# EAGLE board AMR3350 (EAGLE 9.2.0)
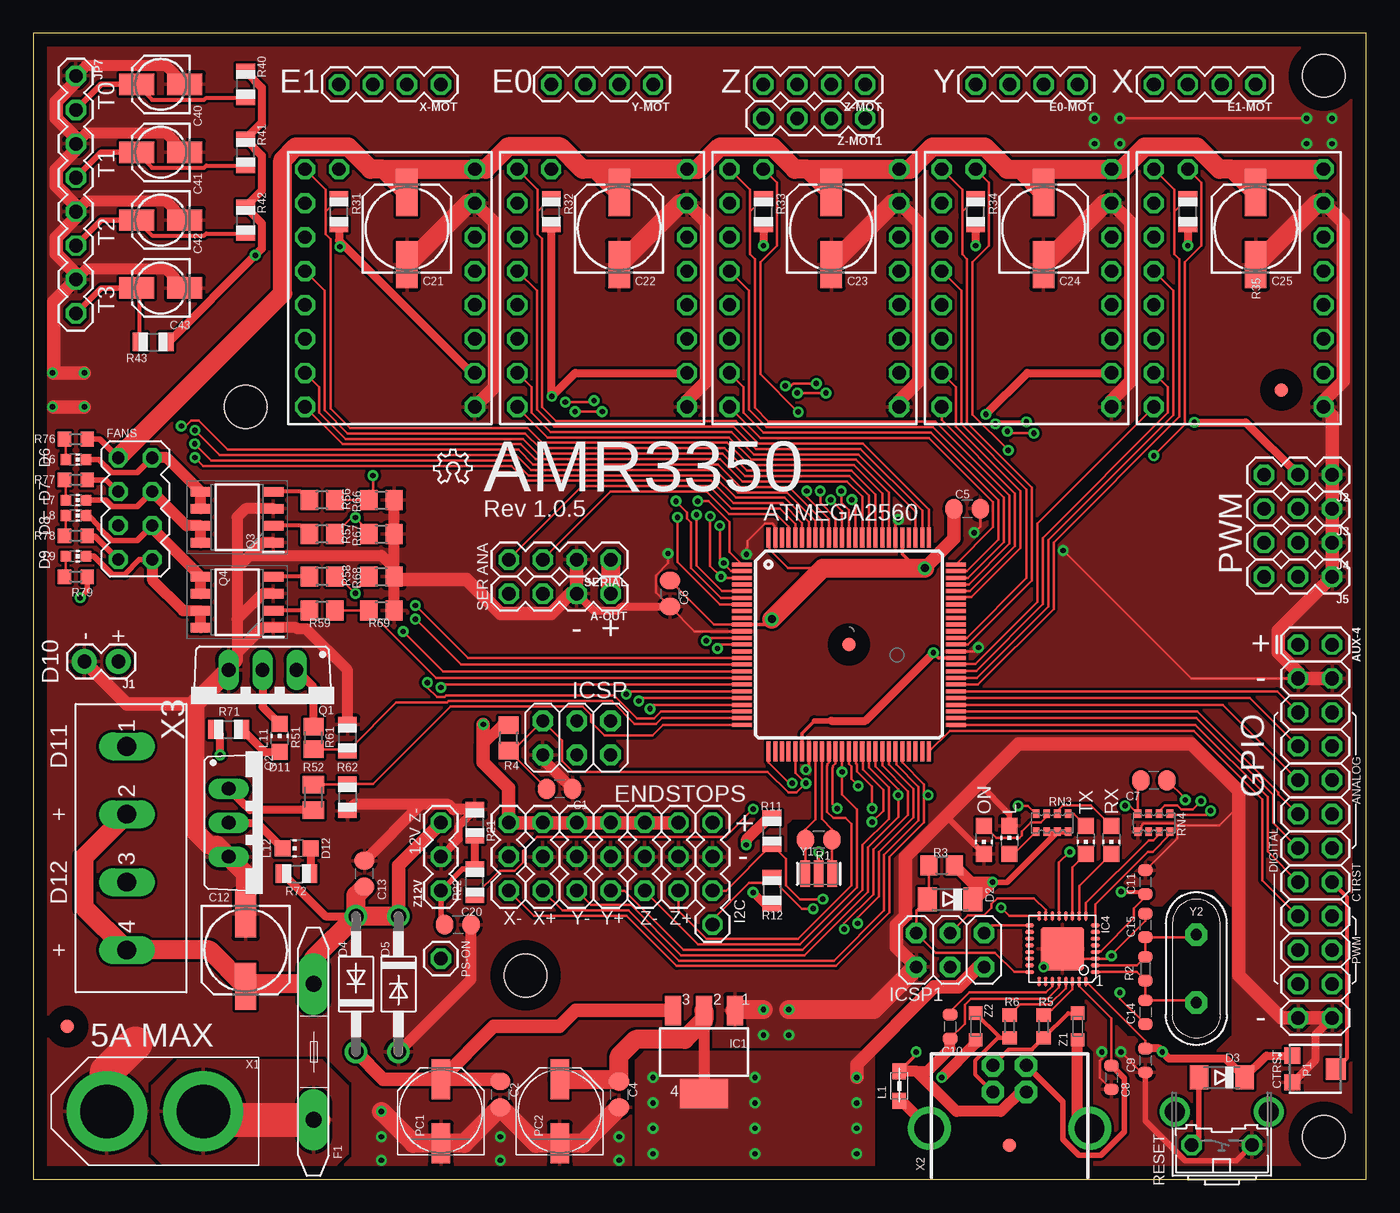
[diagram p0: board, top side]
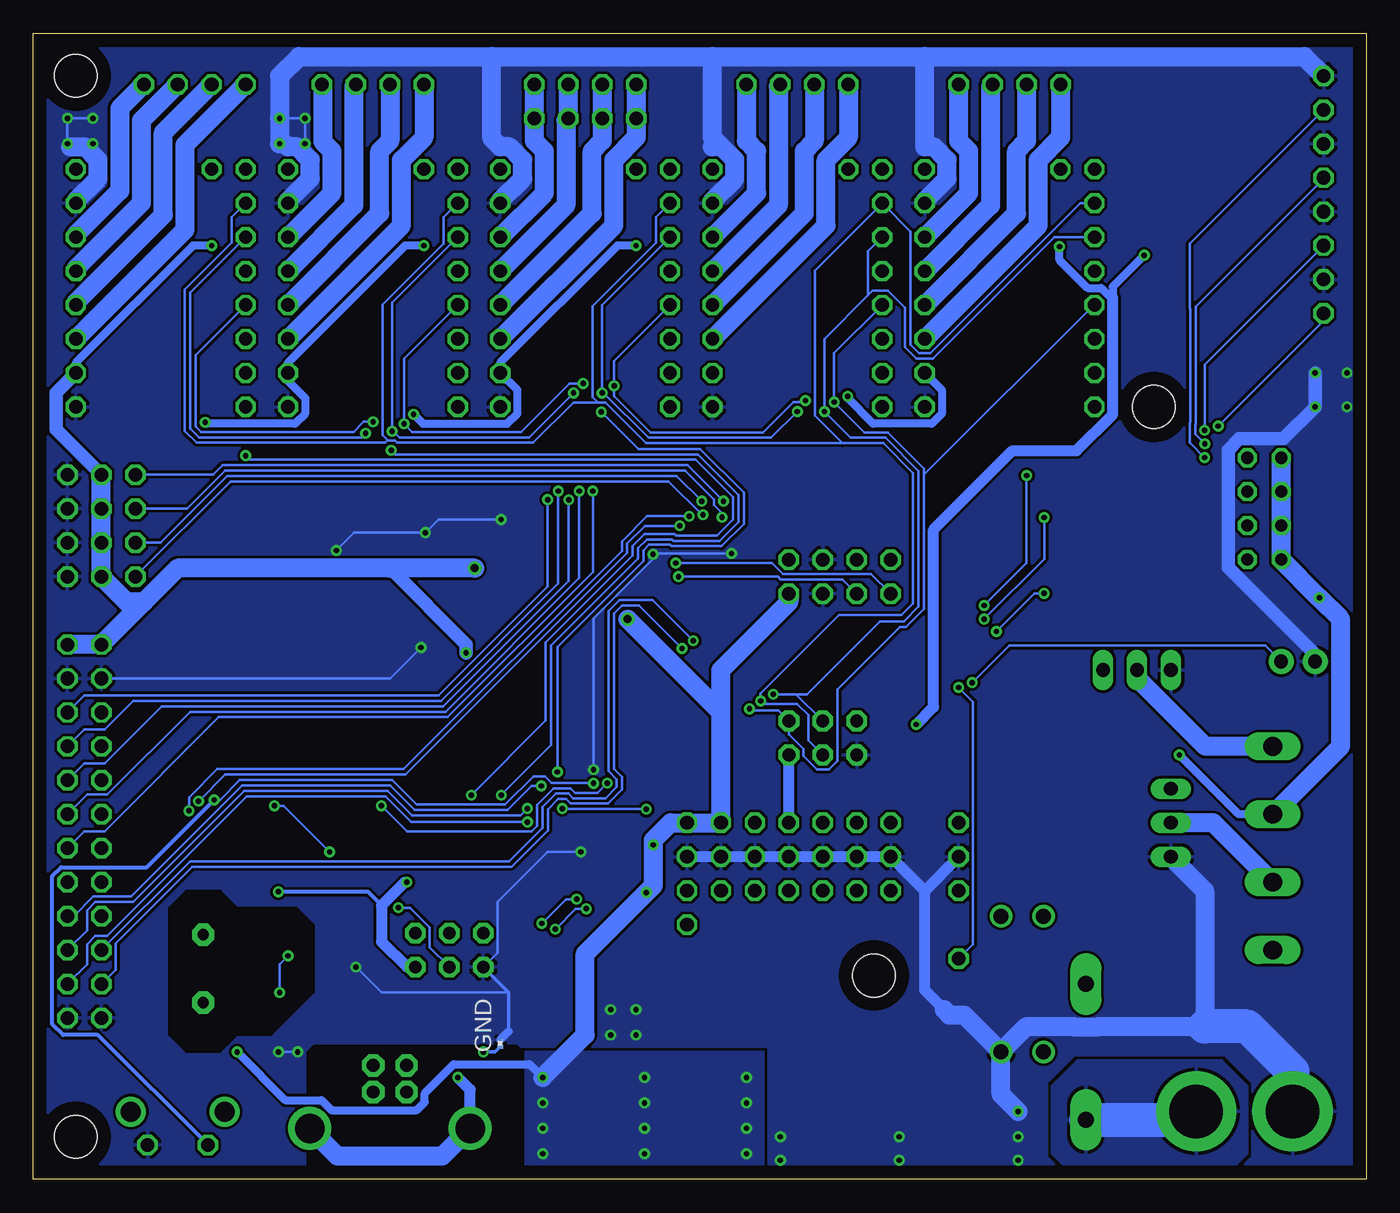
[diagram p1: board, bottom side, seen from below]

Size 99.69 x 85.72 mm. Coordinates in mm from the lower left corner, seen from the top.
Outline: 0,0 99.69,0 99.69,85.72 0,85.72 0,0
Copper layers (1*16): Top 0.035mm / dielectric 1.5mm / Bottom 0.035mm
Design rules "default *": minimum track width 6mil, minimum drill 0.4mm, track to track 8mil, track to pad 8mil, pad to pad 8mil, via to via 8mil, smd to smd 8mil, copper to edge 40mil, drill to drill 6mil, minimum pad ring 10mil, minimum via ring 8mil, stop-mask expansion 4mil, vias tented up to drill 0mil, thermal gap 10mil
Net classes: 1 power: width 0.203 mm, clearance 0.203 mm; 2 gnd: width 0.203 mm, clearance 0.203 mm; 3 power usb: width 0.203 mm, clearance 0.203 mm
Holes 3.2 mm at 96.52,3.17 96.52,82.55 36.83,15.24 15.88,57.78
tKeepout: area 93.5,79.6 to 99.5,85.5; area 93.5,0.2 to 99.5,6.2; area 33.8,12.2 to 39.8,18.2; area 12.9,54.8 to 18.9,60.8

## Footprints (pad centres in the part's own frame; a part is rotated, then mirrored left to right if it is on the bottom)
1X04_SMALL = drill 1.016 octagon: 1 0,0; 2 2.54,0; 3 5.08,0; 4 7.62,0
TQFP100 = smd 1.5 x 0.3: 1 -8,6; 2 -8,5.5; 3 -8,5; 4 -8,4.5; 5 -8,4; 6 -8,3.5; 7 -8,3; 8 -8,2.5; 9 -8,2; 10 -8,1.5; 11 -8,1; 12 -8,0.5; 13 -8,0; 14 -8,-0.5; 15 -8,-1; 16 -8,-1.5; 17 -8,-2; 18 -8,-2.5; 19 -8,-3; 20 -8,-3.5; 21 -8,-4; 22 -8,-4.5; 23 -8,-5; 24 -8,-5.5; 25 -8,-6; 51 8,-6; 52 8,-5.5; 53 8,-5; 54 8,-4.5; 55 8,-4; 56 8,-3.5; 57 8,-3; 58 8,-2.5; 59 8,-2; 60 8,-1.5; 61 8,-1; 62 8,-0.5; 63 8,0; 64 8,0.5; 65 8,1; 66 8,1.5; 67 8,2; 68 8,2.5; 69 8,3; 70 8,3.5; 71 8,4; 72 8,4.5; 73 8,5; 74 8,5.5; 75 8,6 | smd 0.3 x 1.5: 26 -6,-8; 27 -5.5,-8; 28 -5,-8; 29 -4.5,-8; 30 -4,-8; 31 -3.5,-8; 32 -3,-8; 33 -2.5,-8; 34 -2,-8; 35 -1.5,-8; 36 -1,-8; 37 -0.5,-8; 38 0,-8; 39 0.5,-8; 40 1,-8; 41 1.5,-8; 42 2,-8; 43 2.5,-8; 44 3,-8; 45 3.5,-8; 46 4,-8; 47 4.5,-8; 48 5,-8; 49 5.5,-8; 50 6,-8; 76 6,8; 77 5.5,8; 78 5,8; 79 4.5,8; 80 4,8; 81 3.5,8; 82 3,8; 83 2.5,8; 84 2,8; 85 1.5,8; 86 1,8; 87 0.5,8; 88 0,8; 89 -0.5,8; 90 -1,8; 91 -1.5,8; 92 -2,8; 93 -2.5,8; 94 -3,8; 95 -3.5,8; 96 -4,8; 97 -4.5,8; 98 -5,8; 99 -5.5,8; 100 -6,8
2X12_SMALL = drill 1.016 octagon: 1 0,0; 2 0,2.54; 3 2.54,0; 4 2.54,2.54; 5 5.08,0; 6 5.08,2.54; 7 7.62,0; 8 7.62,2.54; 9 10.16,0; 10 10.16,2.54; 11 12.7,0; 12 12.7,2.54; 13 15.24,0; 14 15.24,2.54; 15 17.78,0; 16 17.78,2.54; 17 20.32,0; 18 20.32,2.54; 19 22.86,0; 20 22.86,2.54; 21 25.4,0; 22 25.4,2.54; 23 27.94,0; 24 27.94,2.54
C0805RND = smd 1.3 x 1.5: 1 -0.977,0; 2 0.977,0
C0603-ROUND = smd 0.898 x 1.1: 1 -0.889,0; 2 0.889,0
153CLV-0605 = smd 3.5 x 1.6: + 2.7,0; - -2.7,0
153CLV-0405 = smd 2.6 x 1.6: + 1.8,0; - -1.8,0
MINIMELF = smd 1.4 x 1.8: A 1.7,0; C -1.7,0
DO41-10 = drill 1.118: A 5.08,0; C -5.08,0
MFR500 = drill 1.2 pad 2.3 long: 1 -5.08,0; 2 5.08,0
2X4 = drill 0.9 pad 1.422 octagon: 1 -3.81,-1.27; 2 -3.81,1.27; 3 -1.27,-1.27; 4 -1.27,1.27; 5 1.27,-1.27; 6 1.27,1.27; 7 3.81,-1.27; 8 3.81,1.27
FIDUCIA-MOUNT = smd 1.016 x 1.016: P$1 0,0
R0201 = smd 0.28 x 0.43: 1 -0.255,0; 2 0.255,0
SOT223 = smd 1.219 x 2.235: 1 -2.311,-3.099; 2 0,-3.099; 3 2.311,-3.099 | smd 3.6 x 2.2: 4 0,3.099
MLF32 = smd 0.7 x 0.28: 1 -2.45,1.75; 2 -2.45,1.25; 3 -2.45,0.75; 4 -2.45,0.25; 5 -2.45,-0.25; 6 -2.45,-0.75; 7 -2.45,-1.25; 8 -2.45,-1.75; 17 2.45,-1.75; 18 2.45,-1.25; 19 2.45,-0.75; 20 2.45,-0.25; 21 2.45,0.25; 22 2.45,0.75; 23 2.45,1.25; 24 2.45,1.75 | smd 0.28 x 0.7: 9 -1.75,-2.45; 10 -1.25,-2.45; 11 -0.75,-2.45; 12 -0.25,-2.45; 13 0.25,-2.45; 14 0.75,-2.45; 15 1.25,-2.45; 16 1.75,-2.45; 25 1.75,2.45; 26 1.25,2.45; 27 0.75,2.45; 28 0.25,2.45; 29 -0.25,2.45; 30 -0.75,2.45; 31 -1.25,2.45; 32 -1.75,2.45 | smd 3.254 x 3.254: 33 0,0
2X03 = drill 0.95 pad 1.55 octagon: 1 -2.54,-1.27; 2 -2.54,1.27; 3 0,-1.27; 4 0,1.27; 5 2.54,-1.27; 6 2.54,1.27
1X02 = drill 1.016 pad 1.88: 1 0,0; 2 2.54,0
1X03_SMALL = drill 1.016 octagon: 1 0,0; 2 2.54,0; 3 5.08,0
1X08_SMALL = drill 1.016 octagon: 1 0,0; 2 2.54,0; 3 5.08,0; 4 7.62,0; 5 10.16,0; 6 12.7,0; 7 15.24,0; 8 17.78,0
CHIP-LED0805 = smd 1.2 x 1.2: A 0,-1.05; C 0,1.05
0805 = smd 1.2 x 1: 1 -1.1,0; 2 1.1,0
CHIP-LED0603 = smd 0.8 x 0.8: A 0,-0.75; C 0,0.75
TC33X-2_1 = smd 1.2 x 1.2: 1 -1,-1.7; 3 1,-1.7 | smd 1.6 x 1.5: 2 0,1.55
PANASONIC_D = smd 3 x 1.4: + 2.4,0; - -2.4,0
1X01_SMALL = drill 1.016 octagon: 1 0,0
TO220BV = drill 1.016 long: D 0,-2.54; G -2.54,-2.54; S 2.54,-2.54
SOIC127P600X175-8N = smd 1.525 x 0.7: 1 -2.712,1.905; 2 -2.712,0.635; 3 -2.712,-0.635; 4 -2.712,-1.905; 5 2.712,-1.905; 6 2.712,-0.635; 7 2.712,0.635; 8 2.712,1.905
R0805RND = smd 1.3 x 1.5: 1 -0.977,0; 2 0.977,0
R0603-ROUND = smd 0.898 x 1.1: 1 -0.889,0; 2 0.889,0
R0805 = smd 1.3 x 1.5: 1 -0.95,0; 2 0.95,0
R0603 = smd 1 x 1.1: 1 -0.85,0; 2 0.85,0
R0805' = smd 1.1 x 1.4: 1 -1,0; 2 1,0
R0805'' = smd 1.3 x 1.5: 1 -0.85,0; 2 0.85,0
M0805 = smd 1.3 x 1.6: 1 -0.95,0; 2 0.95,0
B3F-31XX = drill 1.016 octagon: 1 -2.261,-1.245; 2 2.261,-1.245 | drill 1.499 pad 2.159: 3 -3.505,1.245; 4 3.505,1.245
CAY16 = smd 0.5 x 0.65: 1 -1.2,-0.675; 2 -0.4,-0.675; 3 0.4,-0.675; 4 1.2,-0.675; 5 1.2,0.675; 6 0.4,0.675; 7 -0.4,0.675; 8 -1.2,0.675
TMC2130BREAKOUT = drill 1 octagon: 3 13.97,13.97; CFG-0 13.97,11.43; CFG-1 13.97,3.81; CFG-2 13.97,6.35; CFG-3 13.97,8.89; CFG-6 13.97,1.27; DIR 13.97,19.05; GND 1.27,3.81; GND@0 1.27,19.05; IREF 11.43,1.27; OA1 1.27,11.43; OA2 1.27,13.97; OB1 1.27,8.89; OB2 1.27,6.35; STEP 13.97,16.51; VIO 1.27,16.51; VM 1.27,1.27
XT60 = drill 4 pad 6: P$1 0,0; P$2 7.2,0
PN61729-NOSILK = drill 0.95 pad 1.676 octagon: 1 1.25,4.71; 2 -1.25,4.71; 3 -1.25,2.71; 4 1.25,2.71 | drill 2.2: P$1 -6,0; P$2 6,0
4-PIN = drill 1.397 long: 1 -7.62,5.08; 2 -2.54,5.08; 3 2.54,5.08; 4 7.62,5.08
RESONATOR = smd 0.7 x 2: 1 -1,0; 2 0,0; 3 1,0
QS = drill 0.85 pad 1.676 octagon: 1 -2.54,0; 2 2.54,0
CT/CN0603 = smd 1 x 1: 1 -1,0; 2 1,0

## Placement (x,y rotation side)
A-OUT  [1X04_SMALL]  43.18,43.81 180 top
ATMEGA2560  ATMEGA2560-16AU  [TQFP100]  61,40 0 top
AUX-4  CONN_12X2SMALL  [2X12_SMALL]  94.61,40.01 270 top
C1  22p  [C0805RND]  39.37,29.21 0 top
C2  100n  [C0805RND]  34.92,6.35 270 top
C4  100n  [C0805RND]  43.81,6.35 270 top
C5  100n  [C0805RND]  69.85,50.16 0 top
C6  100n  [C0805RND]  47.62,43.81 270 top
C7  100n  [C0805RND]  83.82,29.84 0 top
C8  100n  [C0603-ROUND]  80.64,7.62 270 top
C9  100n  [C0603-ROUND]  83.19,8.89 270 top
C10  1u  [C0603-ROUND]  68.58,11.43 270 top
C11  100n  [C0603-ROUND]  83.19,22.23 90 top
C12  100uF  [153CLV-0605]  15.88,17.14 270 top
C13  100n  [C0805RND]  24.77,22.86 90 top
C14  22p  [C0603-ROUND]  83.19,12.5 270 top
C15  22p  [C0603-ROUND]  83.19,19 90 top
C20  100n  [C0805RND]  31.75,19.05 0 top
C21  100uF  [153CLV-0605]  27.94,71.12 90 top
C22  100uF  [153CLV-0605]  43.81,71.12 90 top
C23  100uF  [153CLV-0605]  59.69,71.12 90 top
C24  100uF  [153CLV-0605]  75.56,71.12 90 top
C25  100uF  [153CLV-0605]  91.44,71.12 90 top
C40  10uF  [153CLV-0405]  9.53,81.92 180 top
C41  10uF  [153CLV-0405]  9.53,76.83 180 top
C42  10uF  [153CLV-0405]  9.53,71.75 180 top
C43  10uF  [153CLV-0405]  9.53,66.67 180 top
D2  CD1206-S01575  [MINIMELF]  68.58,20.95 180 top
D3  CD1206-S01575  [MINIMELF]  88.9,7.62 180 top
D4  1N4004  [DO41-10]  24.13,14.61 90 top
D5  1N4004  [DO41-10]  27.3,14.61 270 top
E0-MOT  [1X04_SMALL]  78.11,81.92 180 top
E1-MOT  [1X04_SMALL]  91.44,81.92 180 top
F1  MFR500  [MFR500]  20.95,9.53 270 top
FANS  M04X2  [2X4]  7.62,50.16 270 top
FD1  FIDUCIALMOUNT  [FIDUCIA-MOUNT]  61,40 0 top
FD2  FIDUCIALMOUNT  [FIDUCIA-MOUNT]  2.54,11.43 0 top
FD3  FIDUCIALMOUNT  [FIDUCIA-MOUNT]  93.34,59.05 0 top
FD4  FIDUCIALMOUNT  [FIDUCIA-MOUNT]  73.03,2.54 0 top
GND  0  [R0201]  64.77,10.16 90 bottom
I2C  [1X04_SMALL]  50.8,26.67 270 top
IC1  NCP1117ST50T3G  [SOT223]  50.16,9.53 180 top
IC4  ATMEGA16U2-MU  [MLF32]  76.98,17.25 180 top
ICSP  3x2M  [2X03]  40.64,33.02 180 top
ICSP1  3x2M  [2X03]  68.58,17.14 180 top
J1  [1X02]  6.35,38.73 180 top
J2  455-1750-1-ND  [1X03_SMALL]  97.16,52.7 180 top
J3  455-1750-1-ND  [1X03_SMALL]  97.16,50.16 180 top
J4  455-1750-1-ND  [1X03_SMALL]  97.16,47.62 180 top
J5  455-1750-1-ND  [1X03_SMALL]  97.16,45.09 180 top
JP7  [1X08_SMALL]  3.17,82.55 270 top
L  RED  [CHIP-LED0805]  73.03,25.4 0 top
L1  BLM21  [0805]  64.77,6.99 270 top
L6  [CHIP-LED0603]  3.17,53.85 270 top
L7  [CHIP-LED0603]  3.17,50.8 270 top
L8  [CHIP-LED0603]  3.17,49.66 270 top
L9  [CHIP-LED0603]  3.17,46.61 270 top
L11  [CHIP-LED0805]  18.41,33.02 0 top
L12  [CHIP-LED0805]  19.68,24.77 90 top
LOGO2  OSHW_LOGO_6MILX0100-NT  [OSHW_6X100_NOTEXT]  29.97,52.07 0 top
ON  GREEN  [CHIP-LED0805]  71.12,25.4 180 top
P1  TC33X-2-103E  [TC33X-2_1]  95.89,8.26 270 top
PC1  47u  [PANASONIC_D]  30.48,5.08 90 top
PC2  47u  [PANASONIC_D]  39.37,5.08 90 top
PS-ON  [1X01_SMALL]  30.48,16.51 270 top
Q1  STP55NF06L  [TO220BV]  17.14,35.56 180 top
Q2  STP55NF06L  [TO220BV]  17.14,26.67 270 top
Q3  SI4946CDY-T1-GE3  [SOIC127P600X175-8N]  15.24,49.53 180 top
Q4  SI4946CDY-T1-GE3  [SOIC127P600X175-8N]  15.24,43.18 180 top
R1  1M  [R0805RND]  58.75,25.4 180 top
R2  1M  [R0603-ROUND]  83.19,15.75 90 top
R3  10k  [R0805]  67.94,23.5 0 top
R4  10k  [R0805]  35.56,33.02 90 top
R5  22R  [R0603]  75.56,11.43 270 top
R6  22R  [R0603]  73.03,11.43 270 top
R11  3.3K  [R0805']  55.24,26.04 90 top
R12  3.3K  [R0805']  55.24,21.59 270 top
R21  10k  [R0805']  33.02,26.67 270 top
R22  15k  [R0805']  33.02,22.23 90 top
R31  10k  [R0805']  22.86,72.39 90 top
R32  10k  [R0805']  38.73,72.39 90 top
R33  10k  [R0805']  54.61,72.39 90 top
R34  10k  [R0805']  70.48,72.39 90 top
R35  10k  [R0805']  86.36,72.39 90 top
R40  4.7K  [R0805']  15.88,81.92 90 top
R41  4.7K  [R0805']  15.88,76.83 90 top
R42  4.7K  [R0805']  15.88,71.75 90 top
R43  4.7K  [R0805']  8.96,62.64 0 top
R51  10r  [R0805'']  20.95,33.02 90 top
R52  10r  [M0805]  20.95,28.57 270 top
R56  10R  [R0805]  21.59,50.8 180 top
R57  10R  [R0805]  21.59,48.26 180 top
R58  10R  [R0805]  21.59,45.09 180 top
R59  10R  [R0805]  21.59,42.55 180 top
R61  100k  [R0805']  23.5,33.02 90 top
R62  100k  [R0805']  23.5,28.57 270 top
R66  100k  [R0805]  26.04,50.8 0 top
R67  100k  [R0805]  26.04,48.26 0 top
R68  100k  [R0805]  26.04,45.09 0 top
R69  100k  [R0805]  26.04,42.55 0 top
R71  1.8K  [R0805']  14.61,33.66 0 top
R72  1.8K  [R0805']  19.68,22.86 0 top
R76  [R0603]  3.17,55.37 0 top
R77  [R0603]  3.17,52.32 0 top
R78  [R0603]  3.17,48.13 0 top
R79  [R0603]  3.17,45.09 0 top
RESET  [B3F-31XX]  88.9,3.81 0 top
RN3  1k  [CAY16]  76.2,26.67 0 top
RN4  1k  [CAY16]  83.82,26.67 180 top
RX  YELLOW  [CHIP-LED0805]  80.64,25.4 180 top
SERIAL  [1X04_SMALL]  43.18,46.35 180 top
TX  YELLOW  [CHIP-LED0805]  78.74,25.4 180 top
U$1  TMC2130BREAKOUT  [TMC2130BREAKOUT]  34.29,76.83 180 top
U$2  TMC2130BREAKOUT  [TMC2130BREAKOUT]  50.16,76.83 180 top
U$3  TMC2130BREAKOUT  [TMC2130BREAKOUT]  66.04,76.83 180 top
U$4  TMC2130BREAKOUT  [TMC2130BREAKOUT]  97.79,76.83 180 top
U$5  TMC2130BREAKOUT  [TMC2130BREAKOUT]  81.92,76.83 180 top
X1  XT60  [XT60]  12.7,5.08 180 top
X2  USB-B_TH  [PN61729-NOSILK]  73.03,3.81 0 top
X3  4-PIN  [4-PIN]  1.91,24.77 270 top
X+  455-1750-1-ND  [1X03_SMALL]  38.1,21.59 90 top
X-  455-1750-1-ND  [1X03_SMALL]  35.56,21.59 90 top
X-MOT  [1X04_SMALL]  30.48,81.92 180 top
Y1  CSTCE16M0V53-R0 16MHZ  [RESONATOR]  58.75,22.86 0 top
Y2  16MHz  [QS]  87,15.75 270 top
Y+  455-1750-1-ND  [1X03_SMALL]  43.18,21.59 90 top
Y-  455-1750-1-ND  [1X03_SMALL]  40.64,21.59 90 top
Y-MOT  [1X04_SMALL]  46.35,81.92 180 top
Z1  CG0603MLC-05E  [CT/CN0603]  78.11,11.43 90 top
Z2  CG0603MLC-05E  [CT/CN0603]  70.48,11.43 90 top
Z12V  455-1750-1-ND  [1X03_SMALL]  30.48,21.59 90 top
Z+  455-1750-1-ND  [1X03_SMALL]  48.26,21.59 90 top
Z-  455-1750-1-ND  [1X03_SMALL]  45.72,21.59 90 top
Z-MOT  [1X04_SMALL]  62.23,81.92 180 top
Z-MOT1  [1X04_SMALL]  62.23,79.38 180 top

## Library data of the parts
A-OUT AUX-4 E0-MOT E1-MOT I2C J1-J5 JP7 PS-ON SERIAL X+ X- X-MOT Y+ Y- Y-MOT Z12V Z+ Z- Z-MOT Z-MOT1 = SparkFun-Connectors
ATMEGA2560 C1 C2 C4-C11 C13-C15 C20 FD1-FD4 IC4 ICSP ICSP1 R1 R2 X2 Y1 Y2 = SmartPrj
C12 C21-C25 C40-C43 R11 R12 R21 R22 R31-R35 R40-R43 R61 R62 R71 R72 = adafruit
D2-D5 = diode
F1 = RepRapjr
FANS = SparkFun
GND R3-R6 R51 R52 R56-R59 R66-R69 R76-R79 = resistor
IC1 = linear
L L6-L9 L11 L12 ON RX TX = led
L1 = wuerth-elektronik
LOGO2 = OSHW
P1 = TC33X-2-103E; ALLIED_NUMBER: 70153492; ALLIED_PRICE-STOCK: http://www.alliedelec.com/bourns-tc33x-2-103e/70153492/; ARROW_PART_NUMBER: TC33X-2-103E; ARROW_PRICE-STOCK: https://www.arrow.com/en/products/tc33x-2-103e/bourns; DESCRIPTION: Cermet 3mm SMT trimmer,0.1W 10k Bourns TC33 Series SMD Cermet Trimmer Resistor with Solder Pad Terminations, 10k?? ??25% 1/10W ??250ppm/??C Top Adjust; HEIGHT: mm; MANUFACTURER_NAME: Bourns; MANUFACTURER_PART_NUMBER: TC33X-2-103E; RS_PART_NUMBER: 1673549; RS_PRICE-STOCK: http://uk.rs-online.com/web/p/products/1673549
PC1 PC2 = rcl; SPICEPREFIX: C
Q1 Q2 = transistor-power
Q3 Q4 = SI4946CDY-T1-GE3
RESET = switch-omron; MPN: B3F-3100; OC_FARNELL: 959704; OC_NEWARK: 36M3582
RN3 RN4 = resistor-dil; OC_FARNELL: unknown; OC_NEWARK: unknown
U$1-U$5 = TMC2130
X1 = con-other
X3 = con-508-gen
Z1 Z2 = varistor

## Nets
12V-IN [power]: F1.2 X1.P$1
+5V [power usb]: A-OUT.1 ATMEGA2560.10 ATMEGA2560.31 ATMEGA2560.61 ATMEGA2560.80 ATMEGA2560.100 AUX-4.1 AUX-4.2 C4.1 C5.1 C6.1 C9.1 C11.1 D2.C D3.C I2C.1 IC1.2 IC1.4 IC4.4 IC4.32 ICSP1.2 ICSP.2 J2.2 J3.2 J4.2 J5.2 P1.1 PC2.+ R3.2 R4.2 R11.2 R12.2 R31.1 R32.1 R33.1 R34.1 R35.1 R40.2 R41.2 R42.2 R43.2 RN3.2 RN3.3 RN3.4 SERIAL.1 U$1.VIO U$2.VIO U$3.VIO U$4.VIO U$5.VIO X+.3 X-.3 Y+.3 Y-.3 Z+.3 Z-.3
+12V: C12.+ C13.1 C21.+ C22.+ C23.+ C24.+ C25.+ D4.A D5.C F1.1 FANS.1 FANS.3 FANS.5 FANS.7 R71.1 R72.1 R76.2 R77.2 R78.2 R79.2 U$1.VM U$2.VM U$3.VM U$4.VM U$5.VM X3.2 X3.4 Z12V.3
A0: ATMEGA2560.97 SERIAL.3
A1: ATMEGA2560.96 SERIAL.4
A2: ATMEGA2560.95 C40.+ JP7.2 R40.1
A3: ATMEGA2560.94 C41.+ JP7.4 R41.1
A4: ATMEGA2560.93 C42.+ JP7.6 R42.1
A5: ATMEGA2560.92 C43.+ JP7.8 R43.1
A6: ATMEGA2560.91 AUX-4.14
A7: ATMEGA2560.90 AUX-4.12
A8: ATMEGA2560.89 AUX-4.10
A9: ATMEGA2560.88 AUX-4.8
A10: ATMEGA2560.87 AUX-4.6
A11: ATMEGA2560.86 U$1.DIR
A12: ATMEGA2560.85 U$1.STEP
A13: ATMEGA2560.84 U$1.CFG-3
A14: ATMEGA2560.83 R31.2 U$1.CFG-6
A15: ATMEGA2560.82 U$2.DIR
CTRST: AUX-4.16 P1.2
D0: A-OUT.4 ATMEGA2560.2 RN4.2
D1: A-OUT.3 ATMEGA2560.3 RN4.1
D2: ATMEGA2560.6 J2.3
D3: ATMEGA2560.7 J3.3
D4: ATMEGA2560.1 J4.3
D5: ATMEGA2560.5 J5.3
D6: ATMEGA2560.15 R56.1 R66.1
D7: ATMEGA2560.16 R57.1 R67.1
D8: ATMEGA2560.17 R58.1 R68.1
D9: ATMEGA2560.18 R59.1 R69.1
D10: ATMEGA2560.23 J1.1
D11: ATMEGA2560.24 R51.1 R61.1
D12: ATMEGA2560.25 R52.1 R62.1
D13(LED): ATMEGA2560.26 RN3.8
D14: ATMEGA2560.64 U$5.CFG-3
D15: ATMEGA2560.63 R34.2 U$5.CFG-6
D16: ATMEGA2560.13 AUX-4.21
D17: ATMEGA2560.12 AUX-4.19
D18: ATMEGA2560.46 U$4.IREF X-.1
D19: ATMEGA2560.45 X+.1
D22: ATMEGA2560.78 U$2.STEP
D23: ATMEGA2560.77 U$2.CFG-3
D24: ATMEGA2560.76 R32.2 U$2.CFG-6
D25: ATMEGA2560.75 U$3.DIR
D26: ATMEGA2560.74 U$3.STEP
D27: ATMEGA2560.73 U$3.CFG-3
D28: ATMEGA2560.72 R33.2 U$3.CFG-6
D29: ATMEGA2560.71 U$5.DIR
D30: ATMEGA2560.60 U$4.DIR
D31: ATMEGA2560.59 U$4.STEP
D32: ATMEGA2560.58 U$4.CFG-3
D33: ATMEGA2560.57 R35.2 U$4.CFG-6
D34: ATMEGA2560.56 AUX-4.5
D35: ATMEGA2560.55 AUX-4.7
D36: ATMEGA2560.54 AUX-4.9
D37: ATMEGA2560.53 AUX-4.11
D38: ATMEGA2560.50 AUX-4.17
D39: ATMEGA2560.70 U$5.STEP
D40: ATMEGA2560.52 AUX-4.13
D41: ATMEGA2560.51 AUX-4.15
D42: ATMEGA2560.42 U$5.IREF Y-.1
D43: ATMEGA2560.41 Y+.1
D44: ATMEGA2560.40 AUX-4.22
D45: ATMEGA2560.39 AUX-4.20
D46: ATMEGA2560.38 AUX-4.18
D47: ATMEGA2560.37 U$3.IREF Z-.1
D48: ATMEGA2560.36 R22.1
D49: ATMEGA2560.35 Z+.1
D53: ATMEGA2560.19 PS-ON.1
D+: R6.2 X2.3 Z2.2
D-: R5.2 X2.2 Z1.2
DTR: C7.1 IC4.13 RN4.4
E0-1: E0-MOT.1 U$5.OB2
E0-2: E0-MOT.2 U$5.OB1
E0-3: E0-MOT.3 U$5.OA1
E0-4: E0-MOT.4 U$5.OA2
E1-1: E1-MOT.1 U$4.OB2
E1-2: E1-MOT.2 U$4.OB1
E1-3: E1-MOT.3 U$4.OA1
E1-4: E1-MOT.4 U$4.OA2
GND [gnd]: A-OUT.2 ATMEGA2560.11 ATMEGA2560.32 ATMEGA2560.62 ATMEGA2560.81 ATMEGA2560.99 AUX-4.3 AUX-4.4 AUX-4.23 AUX-4.24 C1.2 C2.2 C4.2 C5.2 C6.2 C8.2 C9.2 C11.2 C12.- C13.2 C14.2 C15.2 C20.2 C21.- C22.- C23.- C24.- C25.- C40.- C41.- C42.- C43.- D5.A GND.2 I2C.2 IC1.1 IC4.3 IC4.33 ICSP1.6 ICSP.6 J1.2 J2.1 J3.1 J4.1 J5.1 JP7.1 JP7.3 JP7.5 JP7.7 L.C ON.C P1.3 PC1.- PC2.- Q1.S Q2.S Q3.1 Q3.3 Q4.1 Q4.3 R21.1 R61.2 R62.2 R66.2 R67.2 R68.2 R69.2 RESET.2 RN4.5 SERIAL.2 U$1.GND U$1.GND@0 U$2.GND U$2.GND@0 U$3.GND U$3.GND@0 U$4.GND U$4.GND@0 U$5.GND U$5.GND@0 X1.P$2 X+.2 X-.2 Y1.2 Y+.2 Y-.2 Z12V.2 Z+.2 Z-.2
L: L.A RN3.1
M8RXD: IC4.9 RN4.7
M8TXD: IC4.8 RN4.8
MISO: ATMEGA2560.22 ICSP.1 U$1.CFG-0 U$2.CFG-0 U$3.CFG-0 U$4.CFG-0 U$5.CFG-0
MISO2: IC4.17 ICSP1.1
MOSI: ATMEGA2560.21 ICSP.4 U$1.CFG-1 U$2.CFG-1 U$3.CFG-1 U$4.CFG-1 U$5.CFG-1
MOSI2: IC4.16 ICSP1.4
N$1: L9.A R79.1
N$2: L8.A R78.1
N$3: C20.1 R21.2 R22.2 Z12V.1
N$4: L6.A R76.1
N$5: L7.A R77.1
N$107: L12.A R72.2
N$108: L11.A R71.2
ON: ON.A RN3.7
Q1-D: L11.C Q1.D X3.1
Q1-G: Q1.G R51.2
Q2-D: L12.C Q2.D X3.3
Q2-G: Q2.G R52.2
Q6-D: FANS.2 L6.C Q3.5 Q3.6
Q6-G: Q3.4 R56.2
Q7-D: FANS.4 L7.C Q3.7 Q3.8
Q7-G: Q3.2 R57.2
Q8-D: FANS.6 L8.C Q4.5 Q4.6
Q8-G: Q4.4 R58.2
Q9-D: FANS.8 L9.C Q4.7 Q4.8
Q9-G: Q4.2 R59.2
RD+: IC4.29 R6.1
RD-: IC4.30 R5.1
RESET: ATMEGA2560.30 C1.1 C7.2 D3.A ICSP.5 R4.1 RESET.1
RESET2: D2.A IC4.24 ICSP1.5 R3.1
RX: RN3.6 RX.A
RXL: IC4.10 RX.C
SCK: ATMEGA2560.20 ICSP.3 U$1.CFG-2 U$2.CFG-2 U$3.CFG-2 U$4.CFG-2 U$5.CFG-2
SCK2: IC4.15 ICSP1.3
SCL: ATMEGA2560.43 I2C.4 R12.1
SDA: ATMEGA2560.44 I2C.3 R11.1
TX: RN3.5 TX.A
TXL: IC4.11 TX.C
UGND [gnd]: C10.2 GND.1 IC4.28 L1.1 X2.4
USBVCC [power usb]: C8.1 IC4.31 X2.1
USHIELD [gnd]: L1.2 X2.P$1 X2.P$2 Z1.1 Z2.1
VIN [power]: C2.1 D4.C IC1.3 PC1.+
VUCAP: C10.1 IC4.27
X-1: U$1.OB2 X-MOT.1
X-2: U$1.OB1 X-MOT.2
X-3: U$1.OA1 X-MOT.3
X-4: U$1.OA2 X-MOT.4
XT1: C14.1 IC4.1 R2.1 Y2.2
XT2: C15.1 IC4.2 R2.2 Y2.1
XTAL1: ATMEGA2560.34 R1.1 Y1.3
XTAL2: ATMEGA2560.33 R1.2 Y1.1
Y-1: U$2.OB2 Y-MOT.1
Y-2: U$2.OB1 Y-MOT.2
Y-3: U$2.OA1 Y-MOT.3
Y-4: U$2.OA2 Y-MOT.4
Z-1: U$3.OB2 Z-MOT1.1 Z-MOT.1
Z-2: U$3.OB1 Z-MOT1.2 Z-MOT.2
Z-3: U$3.OA1 Z-MOT1.3 Z-MOT.3
Z-4: U$3.OA2 Z-MOT1.4 Z-MOT.4

## Tracks (layer width: path | path; a pad name or v marks a point on that pad's centre or on a via)
12V-IN
  Top 2.54: X1.P$1 13.34,4.45 F1.2
  Bottom 2.54: X1.P$1 13.34,4.45 F1.2
  pour Top: 8.89,5.08 8.89,6.99 10.79,8.89 21.59,8.89 23.5,6.99 23.5,1.91 21.59,0 10.79,0 8.89,1.91
  pour Bottom: 8.89,5.08 8.89,6.99 10.79,8.89 21.59,8.89 23.5,6.99 23.5,1.91 21.59,0 10.79,0 8.89,1.91
+5V  (via drill 0.4, 0.6)
  Top 0.203: C11.1 83.19,21.11 82.33,20.25 82.33,19.55 79.84,17.05 79.48,17.05 IC4.4 | IC4.32 83.19,10.35 C9.1 | ATMEGA2560.100 55.05,47.95 55.05,47.12 56.45,45.72 59.05,45.72 | ATMEGA2560.10 50.92,41.5 C6.1
  Top 0.254: ATMEGA2560.31 57.5,33.37 58.42,34.29 | ATMEGA2560.10 54.84,41.5 v55.24,41.91 | ATMEGA2560.80 65,46.76 66.04,45.72 | ATMEGA2560.61 67.71,39 v67.33,39.39
  Top 0.305: v81.36,21.51 83.02,21.51 C11.1
  Top 0.406: 58.42,34.29 59.69,34.29 | v71.75,22.23 72.83,22.23 RN3.3 | RN3.2 RN3.3 | RN3.3 RN3.4
  Top 0.61: 59.69,34.29 62.23,34.29 v67.33,39.39 | C9.1 84.2,9.78 v84.45,9.53 84.95,9.03 89.19,9.03 D3.C 92.23,9.26 P1.1 | R40.2 15.88,82.88 17.08,81.67 17.08,79.04 R41.2 15.88,77.8 17.08,76.59 17.08,73.96 R42.2 15.88,72.72 17.08,71.52 17.08,69.61 v16.6,69.13 10.11,62.64 R43.2 | R12.2 54.7,20.59 v53.84,21.45 | R33.1 v54.61,69.85 | R34.1 v70.48,69.85 | R35.1 v86.36,69.85 | U$1.VIO 32.77,60.33 22.94,70.16 | R31.1 22.86,70.23 22.94,70.16 | U$2.VIO 40.53,60.33 v38.78,58.57 38.78,71.35 R32.1 | v86.84,56.62 90.69,56.62 J2.2 | v71.25,57.23 74.35,60.33 U$5.VIO | v22.94,69.77 22.94,70.16
  Top 0.813: IC1.2 IC1.4 | R11.2 54.98,27.04 53.32,25.38 v53.32,25.02 | D2.C 70.48,20.95 v71.75,22.23 70.17,22.23 R3.2 | 33.66,32.57 35.05,33.97 R4.2
  Top 1.016: v66.67,45.72 68.87,47.92 C5.1 | v61.59,7.62 61.59,8.6 67.38,14.39 69.2,14.39 70.68,15.88 ICSP1.2 | Z+.3 Z-.3 Y+.3 Y-.3 X+.3 X-.3 35.56,29.29 33.66,31.2 33.66,32.57 v33.66,34.02
  Top 1.422: PC2.+ 43.66,7.48 C4.1 43.81,9.23 45.05,10.46 48.72,10.46 50.16,11.91 IC1.2 | v55.24,41.91 59.05,45.72 66.04,45.72 v66.67,45.72 | SERIAL.1 A-OUT.1
  Bottom 0.305: 73.66,20.49 74.67,21.51 v81.36,21.51
  Bottom 0.61: v84.45,9.53 80.86,5.93 78.15,5.93 77.4,5.17 71.03,5.17 70.43,5.77 70.43,6.43 68.25,8.61 62.59,8.61 v61.59,7.62 | v54.61,69.85 56,69.85 64.77,61.08 U$3.VIO 63.51,59.06 63.51,57.26 64.25,56.52 70.54,56.52 v71.25,57.23 | v70.48,69.85 71.88,69.85 80.64,61.08 U$5.VIO 80.64,59.72 79.36,58.43 79.38,58.41 79.38,57.26 80.12,56.52 86.74,56.52 v86.84,56.62 | v86.36,69.85 87.75,69.85 96.52,61.08 U$4.VIO | U$1.VIO 31.75,59.05 31.75,57.27 32.5,56.52 36.88,56.52 38.78,58.43 v38.78,58.57 | v22.94,69.77 22.94,68.78 20.84,66.68 19.81,66.68 19.1,65.97 18.96,65.97 18.96,66.77 v16.6,69.13
  Bottom 0.813: Y+.3 ICSP.2 | ICSP1.2 71.75,15.88 73.66,17.78 73.66,20.49 71.92,22.23 v71.75,22.23 | v33.66,34.02 32.36,35.32 32.36,48.6 26.44,54.52 21.66,54.52 18.96,57.22 18.96,65.97
  Bottom 1.016: J2.2 97.98,56.08 97.98,58.86 U$4.VIO | 73.03,45.72 67.33,40.02 v67.33,39.39
  Bottom 1.422: v61.59,7.62 58.42,10.79 58.42,16.87 v53.84,21.45 53.32,21.97 v53.32,25.02 53.32,25.38 52.03,26.67 I2C.1 Z+.3 48.26,34.92 | 48.26,34.92 v55.24,41.91 | v66.67,45.72 73.03,45.72 88.9,45.72 91.44,43.18 | 91.44,43.18 AUX-4.1 AUX-4.2 | 91.44,43.18 92.71,43.18 J5.2 J4.2 J3.2 J2.2 | 48.26,34.92 48.26,38.1 43.18,43.18 A-OUT.1
  other vias: 46.35,7.62 46.35,5.71 46.35,3.81 46.35,1.91 53.98,7.62 53.98,5.71 53.98,3.81 53.98,1.91 61.59,5.71 61.59,3.81 61.59,1.91
  pour Bottom (no thermals): 45.09,0 62.87,0 62.87,9.53 45.09,9.53
  pour Top (no thermals): 45.09,0 62.87,0 62.87,9.53 45.72,9.53 45.09,8.89
+12V  (via drill 0.4)
  Top 0.406: FANS.7 4.57,48.13 R78.2 | FANS.3 5.46,52.32 R77.2 | FANS.1 4.95,55.37 R76.2 | R79.2 4.03,44.03 v3.49,43.5
  Top 0.61: v13.97,31.75 13.97,33.29 R71.1 | R72.1 21.86,19.68 D4.A
  Top 1.016: D5.C 27.3,23.5 Z12V.3
  Top 1.422: D4.A 20.95,16.51 F1.1 16.04,14.61 C12.+ 13.18,17.14 X3.4 3.81,20.32 3.81,24.13 X3.2 | D5.C D4.A | 42.07,75.56 U$2.VM 49.71,75.56 51.38,77.23 55.3,77.23 56.97,75.56 57.95,75.56 | D4.A 24.13,21.25 C13.1 | 57.95,75.56 U$3.VM 65.59,75.56 67.25,77.23 71.18,77.23 72.84,75.56 73.82,75.56 | 73.82,75.56 U$5.VM 81.46,75.56 83.13,77.23 87.05,77.23 88.72,75.56 89.69,75.56 | 89.69,75.56 U$4.VM | FANS.1 18.65,66.28 18.65,76.26 19.63,77.23 23.55,77.23 25.22,75.56 26.2,75.56 | 26.2,75.56 U$1.VM 33.84,75.56 35.5,77.23 39.43,77.23 41.09,75.56 42.07,75.56 | 73.82,75.56 C24.+ | C23.+ 57.95,75.56 | C22.+ 42.07,75.56 | C21.+ 26.2,75.56 | C25.+ 89.69,75.56
  Bottom 0.61: X3.2 9.53,27.3 v13.97,31.75
  Bottom 1.422: FANS.1 FANS.3 FANS.5 FANS.7 v3.49,43.5 1.91,41.91 1.91,32.38 X3.2
A0
  Top 0.203: ATMEGA2560.97 56.5,48.83 55.56,49.77 52.04,49.77 50.37,51.44 43.19,51.44 SERIAL.3
A1
  Top 0.203: ATMEGA2560.96 57,49.04 55.86,50.17 52.21,50.17 50.53,51.85 41.05,51.85 SERIAL.4
A2  (via drill 0.4)
  Top 0.203: v12.08,53.99 12.72,53.36 35.78,53.36 36.88,52.26 50.7,52.26 52.38,50.58 56.03,50.58 57.5,49.11 ATMEGA2560.95
  Top 0.305: R40.1 12.93,80.92 12.77,80.76 8.88,80.76 C40.+
  Top 0.406: JP7.2 5.08,81.92 C40.+
  Bottom 0.203: JP7.2 13.2,69.99 13.2,65.15 13.16,65.11 13.16,56.66 13.2,56.62 13.2,55.11 v12.08,53.99
A3  (via drill 0.4)
  Top 0.203: v12.06,55.02 13.31,53.77 35.95,53.77 37.05,52.66 50.87,52.66 52.55,50.98 56.2,50.98 58,49.19 ATMEGA2560.94
  Top 0.305: R41.1 12.93,75.83 12.77,75.68 8.88,75.68 C41.+
  Top 0.406: JP7.4 5.08,76.83 C41.+
  Bottom 0.203: v12.06,55.02 12.37,55.32 12.79,55.74 12.79,56.45 12.75,56.49 12.75,65.28 3.17,74.85 JP7.4
A4  (via drill 0.4)
  Top 0.203: v12.08,56.03 13.94,54.17 36.12,54.17 37.22,53.07 51.04,53.07 52.72,51.39 56.37,51.39 58.5,49.26 ATMEGA2560.93
  Top 0.305: R42.1 12.93,70.75 12.77,70.6 8.88,70.6 C42.+
  Top 0.406: JP7.6 5.08,71.75 C42.+
  Bottom 0.203: JP7.6 12.08,60.95 v12.08,56.03
A5  (via drill 0.4)
  Top 0.203: v11.06,56.34 11.39,56.34 11.79,56.74 12.37,56.74 14.54,54.58 36.29,54.58 37.39,53.48 51.21,53.48 52.88,51.8 56.54,51.8 59,49.34 ATMEGA2560.92
  Top 0.305: R43.1 7.96,66.44 C43.+
  Top 0.406: JP7.8 5.08,66.67 C43.+
  Bottom 0.203: v11.06,56.34 3.17,64.23 JP7.8
A6  (via drill 0.4)
  Top 0.203: ATMEGA2560.91 59.5,49.41 57.85,51.06 v57.85,51.49
  Bottom 0.203: AUX-4.14 95.89,26.04 94.38,26.04 85.84,34.57 68.69,34.57 57.85,45.42 v57.85,51.49
A7  (via drill 0.4)
  Top 0.203: ATMEGA2560.90 60,49.48 58.86,50.62 v58.86,51.49
  Bottom 0.203: AUX-4.12 95.68,28.78 94.17,28.78 87.98,34.98 68.86,34.98 58.86,44.98 v58.86,51.49
A8  (via drill 0.4)
  Top 0.203: ATMEGA2560.89 60.5,49.99 v59.65,50.84
  Bottom 0.203: AUX-4.10 95.89,31.11 94.38,31.11 90.11,35.38 69.03,35.38 59.65,44.77 v59.65,50.84
A9  (via drill 0.4)
  Top 0.203: ATMEGA2560.88 61,50.06 60.43,50.63 v60.43,51.49
  Bottom 0.203: AUX-4.8 95.89,33.66 94.38,33.66 92.24,35.79 69.2,35.79 60.43,44.55 v60.43,51.49
A10  (via drill 0.4)
  Top 0.203: ATMEGA2560.87 61.5,50.57 v61.22,50.85
  Bottom 0.203: AUX-4.6 95.89,36.2 69.37,36.2 61.22,44.34 v61.22,50.85
A11
  Top 0.203: U$1.DIR 23.12,54.98 36.45,54.98 37.56,53.88 51.38,53.88 53.05,52.2 60.87,52.2 62,51.08 ATMEGA2560.86
A12
  Top 0.203: U$1.STEP 21.38,59.27 21.38,57.36 23.35,55.39 36.62,55.39 37.73,54.29 51.54,54.29 53.22,52.61 61.04,52.61 62.5,51.15 ATMEGA2560.85
A13
  Top 0.203: U$1.CFG-3 21.79,66.48 21.79,57.53 23.52,55.8 36.79,55.8 37.9,54.69 51.71,54.69 53.39,53.02 61.21,53.02 63,51.23 ATMEGA2560.84
A14
  Top 0.203: U$1.CFG-6 21.86,74.03 21.86,72.39 | 21.86,72.39 21.86,70.71 22.23,70.34 22.23,57.66 23.68,56.2 36.96,56.2 38.06,55.1 51.88,55.1 53.56,53.42 61.38,53.42 63.5,51.3 ATMEGA2560.83 | 21.86,72.39 R31.2
A15
  Top 0.203: ATMEGA2560.82 64,51.38 61.55,53.83 53.73,53.83 52.05,55.51 38.47,55.51 U$2.DIR
CTRST
  Top 0.305: P1.2 98.27,9.09 98.27,21.11 AUX-4.16
D0  (via drill 0.4)
  Top 0.203: ATMEGA2560.2 52.17,45.5 51.64,46.03 v51.64,46.1 51.34,46.4 v51.34,48.88 | v87.34,28.29 86.73,27.67 85.87,27.67 85.57,27.98 84.64,27.98 84.22,27.55 RN4.2
  Bottom 0.203: v51.34,48.88 53.95,48.88 55.27,47.56 55.27,46.84 71.84,30.28 85.35,30.28 v87.34,28.29 | v51.64,46.1 44.44,46.1 43.62,45.29 37.03,45.29 A-OUT.4
D1  (via drill 0.4)
  Top 0.203: ATMEGA2560.3 51.52,45 v51.44,45.09 50.63,45.89 v50.63,49.6 | RN4.1 85.1,27.27 87.76,27.27 v88.06,27.57
  Bottom 0.203: v50.63,49.6 53.8,49.6 55.68,47.73 55.68,47.01 72.01,30.68 85.95,30.68 88.05,28.58 v88.05,27.57 v88.06,27.57 | A-OUT.3 39.17,44.88 43.79,44.88 43.99,45.09 v51.44,45.09
D2  (via drill 0.4)
  Top 0.203: ATMEGA2560.6 51.44,43.5 49.2,45.74 49.2,49.12 48.9,49.42 48.9,49.88 48.07,50.71 v48.07,50.73
  Bottom 0.203: J2.3 86.24,52.7 85.52,53.42 50.76,53.42 v48.07,50.73
D3  (via drill 0.4)
  Top 0.203: ATMEGA2560.7 51.37,43 48.19,46.18 v48.19,49.53
  Bottom 0.203: J3.3 88.2,50.16 85.35,53.02 50.93,53.02 48.78,50.87 48.78,50.44 48.19,49.84 v48.19,49.53
D4  (via drill 0.4)
  Top 0.203: ATMEGA2560.1 52.06,46.94 52.06,49.18 50.5,50.73 v49.69,50.73
  Bottom 0.203: J4.3 90.17,47.62 85.18,52.61 51.57,52.61 v49.69,50.73
D5  (via drill 0.4)
  Top 0.203: ATMEGA2560.5 51.51,44 49.61,45.9 v49.61,49.72
  Bottom 0.203: J5.3 84.96,52.2 52.17,52.2 49.68,49.72 v49.61,49.72
D6  (via drill 0.4)
  Top 0.203: ATMEGA2560.15 32.5,39 v28.57,42.93 | v25.4,52.65 25.4,51.12 R66.1 R56.1
  Bottom 0.203: v28.57,42.93 25.4,46.1 v25.4,52.65
D7  (via drill 0.4)
  Top 0.203: ATMEGA2560.16 31.98,38.5 v28.57,41.91 | 22.86,48.26 R57.1 23.79,49.51 v24.08,49.51 25.09,48.51 R67.1
  Bottom 0.203: v28.57,41.91 24.08,46.41 v24.08,49.51
D8  (via drill 0.4)
  Top 0.203: ATMEGA2560.17 30.64,38 v27.65,40.98 | R68.1 24.08,44.08 v24.08,43.83 22.83,45.09 R58.1 22.86,45.09
  Bottom 0.203: v27.65,40.98 24.8,43.83 v24.08,43.83
D9
  Top 0.203: ATMEGA2560.18 30.13,37.5 R69.1 R59.1
D10  (via drill 0.4)
  Top 0.203: v29.46,37.16 29.46,36.8 30.18,36.08 30.77,36.08 30.88,36.18 43.45,36.18 45.15,34.48 46.42,34.48 46.94,35 ATMEGA2560.23
  Bottom 0.203: v29.46,37.16 26.7,39.93 7.54,39.93 J1.1
D11
  Top 0.203: 23.64,32.17 R61.1 | ATMEGA2560.24 47.01,34.5 46.59,34.07 44.98,34.07 43.28,35.78 31.05,35.78 30.94,35.67 27.15,35.67 23.68,32.2 23.64,32.17 | R51.1 23.64,32.17
D12
  Top 0.203: ATMEGA2560.25 47.09,34 46.3,33.21 42.73,33.21 41.72,34.22 41.72,34.74 41.09,35.37 31.22,35.37 25.42,29.57 R62.1 23.45,29.52 R52.1
D13(LED)  (via drill 0.4)
  Top 0.203: v73.66,27.94 74.41,27.94 RN3.8 | v56.77,29.64 56.53,29.64 55,31.17 ATMEGA2560.26
  Bottom 0.203: v56.77,29.64 57.49,28.91 59.16,28.91 59.51,29.26 60.77,29.26 62.02,28.01 62.02,26.44 62.44,26.02 71.74,26.02 v73.66,27.94
D14
  Top 0.203: ATMEGA2560.64 69.83,40.5 74.3,44.96 74.3,51.6 69.41,56.48 69.41,66.48 U$5.CFG-3
D15
  Top 0.203: ATMEGA2560.63 69.91,40 74.7,44.8 74.7,51.76 69.85,56.62 69.85,68.84 69.48,69.21 69.48,71.75 69.48,72.39 | U$5.CFG-6 69.48,74.03 69.48,72.39 | R34.2 69.48,72.39
D16  (via drill 0.4)
  Top 0.203: ATMEGA2560.13 51.47,40 v51.18,39.71
  Bottom 0.203: AUX-4.21 93.55,15.67 93.55,17.64 87.81,23.38 63.93,23.38 61.2,26.11 61.2,27.67 60.43,28.44 59.84,28.44 59.5,28.1 56.73,28.1 55.66,29.17 55.66,30.1 56.26,30.7 56.26,42.33 55.67,42.93 54.4,42.93 v51.18,39.71
D17  (via drill 0.4)
  Top 0.203: ATMEGA2560.12 50.54,40.5 v50.34,40.29
  Bottom 0.203: AUX-4.19 87.98,23.78 64.1,23.78 61.61,26.27 61.61,27.84 60.6,28.85 59.68,28.85 59.33,28.51 56.9,28.51 56.06,29.34 56.06,29.93 56.67,30.54 56.67,42.5 55.83,43.33 53.38,43.33 v50.34,40.29
D18  (via drill 0.4)
  Top 0.203: X-.1 37.44,19.71 44.37,19.71 48.13,15.95 60.05,15.95 64.05,19.95 64.05,24.1 66.63,26.68 66.63,29.05 | ATMEGA2560.46 65,31.17 66.63,29.54 66.63,29.05 | 66.63,29.05 v66.93,28.74 | v83.82,54.13 86.13,56.44 86.13,68.62 87.36,69.85 87.36,74.56 U$4.IREF
  Bottom 0.203: v66.93,28.74 61.37,34.31 61.37,40.17 54.86,46.68 54.86,47.39 53.97,48.28 51.75,48.28 51.64,48.17 48.54,48.17 47.36,49.35 47.36,51.03 50.16,53.83 83.52,53.83 v83.82,54.13
D19
  Top 0.203: X+.1 39.57,20.12 44.53,20.12 48.29,16.36 59.88,16.36 63.64,20.12 63.64,24.27 66.22,26.85 66.22,29.37 64.55,31.05 64.55,31.95 ATMEGA2560.45
D22
  Top 0.203: U$2.STEP 37.25,59.27 37.25,57.36 38.7,55.91 52.22,55.91 53.89,54.24 61.71,54.24 66,49.95 ATMEGA2560.78
D23
  Top 0.203: U$2.CFG-3 37.66,66.48 37.66,57.59 38.93,56.32 52.39,56.32 54.06,54.64 61.88,54.64 66.5,50.02 ATMEGA2560.77
D24
  Top 0.203: U$2.CFG-6 37.73,74.03 37.73,72.39 | 37.73,72.39 37.73,70.71 38.07,70.38 38.07,57.76 39.1,56.73 52.55,56.73 54.23,55.05 62.05,55.05 67,50.1 ATMEGA2560.76 | 37.73,72.39 R32.2
D25
  Top 0.203: ATMEGA2560.75 71.78,48.78 71.78,50.66 66.99,55.46 54.4,55.46 U$3.DIR
D26
  Top 0.203: ATMEGA2560.74 69.83,45.5 72.19,47.86 72.19,50.83 67.14,55.88 54.61,55.88 53.13,57.36 53.13,59.27 U$3.STEP
D27
  Top 0.203: ATMEGA2560.73 69.91,45 72.59,47.69 72.59,51 67.31,56.29 54.84,56.29 53.53,57.59 53.53,66.48 U$3.CFG-3
D28
  Top 0.203: ATMEGA2560.72 69.98,44.5 73.03,47.54 73.03,51.14 67.47,56.69 55.01,56.69 53.98,57.73 53.98,68.84 53.6,69.21 53.6,72.39 | U$3.CFG-6 53.6,74.03 53.6,72.39 | 53.6,72.39 R33.2
D29
  Top 0.203: ATMEGA2560.71 70.06,44 73.43,47.38 73.43,51.31 67.94,56.8 U$5.DIR
D30
  Top 0.203: ATMEGA2560.60 69.05,38.55 69.85,38.55 70.46,38.55 75.11,43.19 75.11,49.07 U$4.DIR
D31
  Top 0.203: ATMEGA2560.59 69.05,38.05 70.54,38.05 75.51,43.02 75.51,47.98 84.88,57.35 84.88,59.27 U$4.STEP
D32
  Top 0.203: ATMEGA2560.58 70.57,37.5 75.92,42.85 75.92,47.81 85.28,57.18 85.28,66.48 U$4.CFG-3
D33
  Top 0.203: ATMEGA2560.57 70.66,37 76.33,42.67 76.33,47.65 85.72,57.04 85.72,68.84 85.36,69.21 85.36,71.75 85.36,72.39 | U$4.CFG-6 85.36,74.03 85.36,72.39 | R35.2 85.36,72.39
D34
  Top 0.203: ATMEGA2560.56 93.04,36.5 AUX-4.5
D35
  Top 0.203: ATMEGA2560.55 91,36 AUX-4.7
D36
  Top 0.203: AUX-4.9 88.96,35.5 ATMEGA2560.54
D37
  Top 0.203: ATMEGA2560.53 87.08,35 93.14,28.94 93.14,28.78 AUX-4.11
D38
  Top 0.203: ATMEGA2560.50 68.55,33.55 86.81,33.55 91.92,28.43 91.92,22.38 AUX-4.17
D39
  Top 0.203: ATMEGA2560.70 69.05,43.55 70.17,43.55 73.84,47.21 73.84,51.48 69,56.31 69,59.27 U$5.STEP
D40
  Top 0.203: AUX-4.13 92.73,26.64 92.73,28.77 87.01,34.5 ATMEGA2560.52
D41
  Top 0.203: AUX-4.15 92.33,24.51 92.33,28.6 86.93,34 ATMEGA2560.51
D42  (via drill 0.4)
  Top 0.203: Y-.1 41.71,20.52 44.7,20.52 48.46,16.76 57.7,16.76 62.42,21.49 62.42,24.84 64.7,27.11 v64.7,28.74 64.7,29.17 63,30.87 ATMEGA2560.42 | v72.93,54.54 70.26,57.22 70.26,68.62 71.49,69.85 71.49,74.56 U$5.IREF
  Bottom 0.203: v64.7,28.74 60.96,32.48 60.96,39.93 54.46,46.43 54.46,47.22 53.8,47.88 51.92,47.88 51.81,47.77 48.37,47.77 46.95,49.18 46.95,51.2 50,54.24 72.62,54.24 v72.93,54.54
D43
  Top 0.203: Y+.1 44.21,21.59 48.63,17.17 57.53,17.17 62.02,21.66 62.02,25 63.99,26.98 63.99,29.31 62.5,30.8 ATMEGA2560.41
D44  (via drill 0.4)
  Top 0.203: ATMEGA2560.40 62.05,31.95 62.05,30.68 63.58,29.14 63.58,27.57 v62.73,26.73
  Bottom 0.203: AUX-4.22 95.68,16.08 95.68,17.59 95.06,18.21 94.18,18.21 83.74,28.65 73.36,28.65 71.44,26.73 v62.73,26.73
D45  (via drill 0.4)
  Top 0.203: ATMEGA2560.39 61.55,31.95 61.55,31.11 61.61,31.05 61.61,30.52 62.74,29.39 v62.74,27.73
  Bottom 0.203: AUX-4.20 95.68,18.62 95.68,20.13 95.06,20.75 92.22,20.75 83.91,29.06 73.2,29.06 71.36,27.22 63.26,27.22 v62.74,27.73
D46  (via drill 0.4)
  Top 0.203: ATMEGA2560.38 61,31.09 61.2,30.88 61.2,29.97 61.5,29.66 v61.71,29.43
  Bottom 0.203: AUX-4.18 96.7,19.68 95.22,21.16 92.39,21.16 84.08,29.46 73.03,29.46 71.19,27.62 64.24,27.62 62.43,29.43 v61.71,29.43
D47  (via drill 0.4)
  Top 0.203: Z-.1 49.73,17.58 57.36,17.58 61.61,21.83 61.61,27.66 60.5,28.77 v60.5,30.48 ATMEGA2560.37 | v57.21,57.4 54.38,60.23 54.38,68.62 55.62,69.85 55.62,74.56 U$3.IREF
  Bottom 0.203: v57.21,57.4 54.45,54.64 49.83,54.64 46.55,51.36 46.55,49.01 48.2,47.36 51.98,47.36 52.09,47.47 53.63,47.47 54.05,47.05 54.05,46.27 60.5,39.82 v60.5,30.48
D48  (via drill 0.4)
  Top 0.203: R22.1 34.86,23.06 36,23.06 36.63,23.69 36.63,24.56 37.67,25.6 51.76,25.6 v53.85,27.69 | ATMEGA2560.36 60,31.09 59.81,30.91 59.81,30.8 59.79,30.77 59.79,28.09 v60.14,27.74
  Bottom 0.203: v60.14,27.74 60.1,27.69 v53.85,27.69
D49
  Top 0.203: Z+.1 48.26,20.08 50.36,17.98 57.19,17.98 61.2,22 61.2,26.58 60.76,27.03 59.84,27.03 59.38,27.49 59.38,30.94 59.41,30.97 59.41,31.07 59.5,31.17 ATMEGA2560.35
D53  (via drill 0.4)
  Top 0.203: ATMEGA2560.19 30.69,37 v30.48,36.79
  Bottom 0.203: v30.48,36.79 29.41,35.72 29.41,17.58 PS-ON.1
D+
  Top 0.305: X2.3 70.48,7.81 70.48,8.92 72.15,10.58 R6.2 72.33,10.58 Z2.2
D-
  Top 0.305: X2.2 72.97,9.71 74.7,9.71 R5.2 77.42,12.43 Z1.2
DTR  (via drill 0.4)
  Top 0.203: C7.1 82.62,29.62 RN4.4 82.03,27.94 v81.66,27.94 | IC4.13 76.73,23.69 v77.53,24.5
  Bottom 0.203: v77.53,24.5 80.98,27.94 v81.66,27.94
E0-1
  Bottom 1.422: U$5.OB2 77.35,73.78 77.35,76.93 78.05,77.63 78.05,81.86 E0-MOT.1
E0-2
  Bottom 1.422: E0-MOT.2 75.72,81.75 75.72,72.86 U$5.OB1
E0-3
  Bottom 1.422: U$5.OA1 73.78,72.27 73.78,76.93 73.03,77.68 E0-MOT.3
E0-4
  Bottom 1.422: U$5.OA2 72.15,71.36 72.15,76.26 70.48,77.92 E0-MOT.4
E1-1
  Bottom 1.422: U$4.OB2 96.52,70.67 93.23,73.96 93.23,80.13 E1-MOT.1
E1-2
  Bottom 1.422: U$4.OB1 96.52,68.13 91.6,73.05 91.6,79.22 E1-MOT.2
E1-3
  Bottom 1.422: E1-MOT.3 89.97,78.3 89.97,72.13 96.52,65.59 U$4.OA1
E1-4
  Bottom 1.422: U$4.OA2 88.35,71.04 88.35,77.39 E1-MOT.4
GND  (via drill 0.4)
  Top 0.203: C14.2 81.28,13.52 v81.28,13.97 | C15.2 83.19,19.33 80.64,16.79 v80.64,16.71 80.43,16.5 IC4.3 77.73,16.5 IC4.33 75.61,15.88 v75.56,15.88 | ATMEGA2560.99 55.45,48.05 55.45,48.88 55.28,49.05 54.72,49.05 53.43,47.76 53.43,47.28 53.34,47.19 v53.34,46.76 | ATMEGA2560.11 49.46,41 C6.2 46.57,43.89 46.57,45.19 47.48,46.09 v47.48,46.81 | ATMEGA2560.62 70.41,39.5 v70.7,39.79 | ATMEGA2560.32 58,30.85 v57.79,30.64 | ATMEGA2560.81 64.5,49.15 v64.71,49.36 | 85.54,26.48 85.4,26.62 83.04,26.62 82.86,26.45 82.86,26.24 RN4.5 | 85.54,26.48 85.58,26.45 85.58,25.5 C11.2 | v95.25,79.38 v81.28,79.38 | C5.2 70.83,48.83 v70.37,48.38 | v77.04,47.04 86.61,37.47 AUX-4.3 | v79.93,9.53 79.93,9.02 79.79,8.87 79.79,7.59 C8.2 | v81.36,9.53 82.88,8 C9.2 | Y1.2 v58.75,24.5 | 85.54,26.48 88.71,26.48 90.17,27.94
  Top 0.406: L.C 73.03,27.3 70.71,29.62 | ON.C 68.39,27.08 68.17,27.08 | C9.2 83.19,4.37 86.16,1.4 89.99,1.4 RESET.2
  Top 0.61: 94.04,7.11 P1.3 94.25,7.25 95.89,8.89 95.89,10.79 AUX-4.24 | Z12V.2 31.81,25.46 31.81,26.43 33.02,27.64 R21.1 | C6.2 44,42.84 43.71,42.55 41.91,42.55 A-OUT.2
  Top 0.813: ICSP.6 38.1,31.46 C1.2 | Q3.3 15.88,50.16 15.24,49.53 15.24,45.72 | Q1.S 15.24,38.73 15.24,39.37 | 15.24,45.72 15.24,41.91 | 15.24,41.91 15.24,39.37 | 15.24,39.37 17.14,41.27 Q4.1 19.65,41.27 19.74,41.19 20.41,41.19 23.5,38.1 R61.2 | Q4.3 17.14,43.81 15.24,41.91 | Q3.1 17.14,47.62 16.19,46.67 | 16.19,46.67 15.24,45.72 | R69.2 R68.2 26.98,45.72 | R66.2 R67.2 26.98,45.72 | D5.A 32.73,14.95 C20.2 | R21.1 31.42,27.67 31.05,28.04 28.97,28.04 | 28.97,28.04 C13.2 | JP7.1 3.95,83.33 9.91,83.33 C40.- | JP7.3 3.95,78.25 9.91,78.25 C41.- | JP7.5 3.95,73.17 9.91,73.17 C42.- | JP7.7 3.95,68.08 9.91,68.08 C43.- | 16.19,46.67 26.03,46.67 26.98,45.72 | 28.97,28.04 23.96,28.04 R62.2
  Top 1.016: U$1.GND@0 34.48,59.25 34.48,71.56 U$1.GND | U$2.GND@0 48.9,58.25 50.36,59.72 50.36,71.56 U$2.GND | U$3.GND@0 64.77,58.25 66.23,59.72 66.23,71.56 U$3.GND | U$5.GND@0 80.64,58.25 82.11,59.72 82.11,71.56 U$5.GND | U$4.GND 97.98,71.56 97.98,59.72 96.52,58.25 U$4.GND@0 97.16,57.15 J5.1 93.14,41.07 93.14,39.4 94.61,37.92 AUX-4.3 AUX-4.4 | SERIAL.2 A-OUT.2 40.18,43.81 38.71,42.34 34.95,42.34 32.41,44.88 27.19,44.88 R68.2 | J1.2 6.99,35.56 12.06,35.56 | AUX-4.24 AUX-4.23 93.34,12.06 90.17,15.24 90.17,27.94 90.17,29.04 86.63,32.58 73.67,32.58 70.71,29.62 68.17,27.08 65.23,24.13 65.23,19.7 64.55,19.03 64.55,17.36 ICSP1.6 | JP7.1 3.17,82.09 1.7,80.62 1.7,79.4 3.17,77.93 JP7.3 3.17,77.01 1.7,75.54 1.7,74.32 3.17,72.85 JP7.5 3.17,71.93 1.7,70.46 1.7,69.24 3.17,67.77 JP7.7 1.52,65.66 1.52,60.33 v3.81,60.33 | v3.81,57.78 1.52,57.78
  Top 1.422: C12.- 15.88,22.86 Q2.S 13.74,24.99 13.15,24.99 12.06,26.08 12.06,35.56 Q1.S | C4.2 41.12,2.68 PC2.- 37.62,2.68 C2.2 32.23,2.68 PC1.- 28.43,2.68 v26.04,5.08 | IC1.1 52.55,12.7 v54.61,12.7 | C21.- 32.55,73.03 U$1.GND | C22.- 48.42,73.03 U$2.GND | C23.- 64.3,73.03 U$3.GND | C24.- 80.17,73.03 U$5.GND | C25.- 96.05,73.03 U$4.GND | v56.52,12.7 62.87,12.7 ICSP1.6
  Top 2.54: X1.P$2 5.5,8.04 7.62,10.16
  Bottom 0.203: v81.28,13.97 81.28,16.08 v80.64,16.71 | v75.56,15.88 73.66,13.97 64.14,13.97 | v57.79,30.64 57.79,41.95 53.34,46.4 v53.34,46.76 53.29,46.81 v47.48,46.81 | v81.28,79.38 v79.38,79.38 v79.38,77.47 v81.28,77.47 | v95.25,79.38 v97.16,79.38 v97.16,77.47 | v97.16,77.47 v95.25,77.47 | v97.16,77.47 96.92,77.23 | v70.7,39.79 73.03,37.47 AUX-4.3 | v64.71,49.36 69.39,49.36 v70.37,48.38 75.7,48.38 v77.04,47.04 | v79.93,9.53 v81.36,9.53 | v58.75,24.5 61.23,24.5 64.96,20.77 64.96,16.95 ICSP1.6
  Bottom 0.254: 64.14,11.05 64.14,13.97 ICSP1.6
  Bottom 0.61: GND.2 64.14,11.05
  Bottom 0.813: 31.58,12.7 33.02,14.14 33.02,21.59 | 33.02,21.59 Z12V.2 | 33.02,21.59 X-.2 I2C.2
  Bottom 1.016: v3.81,60.33 v3.81,57.78 6.2,55.4 9.48,55.4 10.31,54.56 10.31,45.77 3.81,39.26 J1.2
  Bottom 1.422: 14.01,24.13 Q2.S 12.06,21.59 12.06,11.43 20.06,11.43 20.1,11.39 21.81,11.39 21.85,11.43 25.4,11.43 D5.A | 31.58,12.7 31.17,12.29 30.07,12.29 D5.A | v26.04,5.08 27.3,6.35 D5.A | 48.2,77.23 47.23,76.26 47.23,74.87 48.9,73.21 U$2.GND | 48.2,77.23 48.9,77.23 | U$3.GND 64.77,73.21 63.1,74.87 63.1,76.26 64.08,77.23 64.77,77.23 65.41,77.87 65.41,84 | U$5.GND 80.64,73.21 78.98,74.87 78.98,76.26 79.95,77.23 80.64,77.23 80.88,77.47 v81.28,77.47 v81.28,79.38 81.28,82.55 79.83,84 65.41,84 | U$4.GND 96.52,73.21 94.85,74.87 94.85,76.26 95.83,77.23 96.92,77.23 | U$1.GND 33.02,73.21 31.35,74.87 31.35,76.26 32.33,77.23 33.02,77.23 33.02,84 | JP7.1 4.62,84 33.02,84 | 65.41,84 48.9,84 | 48.9,84 33.02,84 | 48.2,77.23 48.9,77.92 48.9,84
  Bottom 2.54: X1.P$2 5.5,8.04 8.89,11.43 12.06,11.43
  other vias: 34.92,3.17 34.92,1.42 43.81,3.17 43.81,1.42 26.04,3.17 26.04,1.42 54.61,10.79 56.52,10.79 1.42,60.33 1.42,57.78
  cutout Top: 85.72,21.59 88.27,21.59 89.53,20.32 89.53,10.79 88.27,9.53 85.72,9.53 84.45,10.79 81.92,10.79 78.74,13.97 78.74,19.05 80.01,20.32 84.45,20.32
  cutout Bottom: 85.72,21.59 88.27,21.59 89.53,20.32 89.53,10.79 88.27,9.53 85.72,9.53 84.45,10.79 81.92,10.79 78.74,13.97 78.74,15.24 78.74,19.05 80.01,20.32 84.45,20.32
  pour Top (rank 2): 99.06,0 80.01,0 79.38,0.64 79.38,9.53 78.74,10.16 78.74,13.97 74.93,10.16 63.5,10.16 62.87,9.53 62.87,0.64 62.23,0 0.64,0 0,0.64 0,85.09 0.64,85.72 99.06,85.72 99.69,85.09 99.69,0.64
  pour Bottom (rank 2): 99.06,0 80.01,0 79.38,0.64 79.38,9.53 78.74,10.16 63.5,10.16 62.87,9.53 62.87,0.64 62.23,0 0.64,0 0,0.64 0,85.09 0.64,85.72 99.06,85.72 99.69,85.09 99.69,0.64
GND1
  cutout Top: 60.67,26.82 56.83,26.82 56.5,26.5 56.5,22.08 57,21.58 60.5,21.58 61,22.08 61,26.5
L
  Top 0.203: L.A 73.36,24.35 RN3.1
M8RXD
  Top 0.203: IC4.9 78.73,20.66 83.43,25.36 83.8,25.36 84.22,25.79 RN4.7
M8TXD
  Top 0.203: IC4.8 79.43,20.58 83.35,24.5 83.73,24.5 85.02,25.79 RN4.8
MISO  (via drill 0.4)
  Top 0.203: v46.13,35.19 46.43,35.5 ATMEGA2560.22 | v71.97,56.51 72.13,56.67 v74.28,56.67 | v39.79,58.15 41.83,58.15 v41.94,58.26 | v56.25,59.37 56.69,59.37 56.86,59.53 v58.57,59.53
  Bottom 0.203: v46.13,35.19 46.01,35.08 43.97,35.08 ICSP.1 43.18,33.28 42.1,32.2 42.1,31.68 41.09,30.67 40.19,30.67 39.56,31.3 39.56,36.64 34.87,41.33 34.42,41.33 33.07,42.67 33.07,52.7 | 33.07,52.7 33.07,53.16 35.79,55.88 37.52,55.88 v39.79,58.15 39.79,61.81 U$2.CFG-0 | U$3.CFG-0 56.25,61.22 v56.25,59.37 56.25,58.6 53.53,55.88 45.1,55.88 42.84,58.14 42.05,58.14 v41.94,58.26 | U$4.CFG-0 87.55,61.67 87.55,56.33 87.14,55.91 75.74,55.91 74.98,56.67 v74.28,56.67 | U$5.CFG-0 71.97,61.38 v71.97,56.51 71.37,55.91 63.2,55.91 59.58,59.53 v58.57,59.53 | 33.07,52.7 20.37,65.41 U$1.CFG-0
MISO2
  Top 0.203: IC4.17 71.7,19 ICSP1.1
MOSI  (via drill 0.4)
  Top 0.203: ATMEGA2560.21 45.5,36 v45.29,35.79
  Bottom 0.203: ICSP.4 41.72,32.83 41.72,34.73 42.56,35.58 45.08,35.58 v45.29,35.79 45.29,36.36 39.44,42.2 34.76,42.2 33.88,43.08 33.88,52.83 36.12,55.07 39.16,55.07 | 39.16,55.07 53.86,55.07 56.91,58.12 57.45,58.12 | 73.15,55.25 73.22,55.25 73.38,55.1 87.47,55.1 88.37,55.99 88.37,66.57 84.88,70.06 84.88,71.97 U$4.CFG-1 | 39.16,55.07 41.23,57.14 41.23,67.99 U$2.CFG-1 34.08,70.91 34.08,62.43 33.46,61.81 32.58,61.81 21.36,73.03 U$1.CFG-1 | 57.45,58.12 57.86,58.53 57.86,65.33 53.13,70.06 53.13,71.97 U$3.CFG-1 | 73.15,55.25 72.64,55.25 72.48,55.1 62.31,55.1 59.3,58.12 57.45,58.12 | 73.15,55.25 73.57,55.67 73.57,65.44 69,70 69,71.97 U$5.CFG-1
MOSI2  (via drill 0.4)
  Top 0.203: IC4.16 73.01,19.7 v72.39,20.32
  Bottom 0.203: v72.39,20.32 71.5,20.32 70.04,18.86 70.04,17.34 ICSP1.4
N$1
  Top 0.203: R79.1 2.42,45.19 L9.A
N$2
  Top 0.203: R78.1 2.42,48.23 L8.A
N$3
  Top 0.406: R22.2 32.12,23.23 Z12V.1 30.48,19.34 C20.1
  Top 0.61: R21.2 R22.2
N$4
  Top 0.203: L6.A 2.42,55.27 R76.1
N$5
  Top 0.203: L7.A 2.42,52.22 R77.1
N$107
  Top 0.61: L12.A 20.73,22.91 R72.2
N$108
  Top 0.61: R71.2 17.29,31.97 L11.A
ON
  Top 0.203: ON.A 72.03,25.55 73.75,25.55 73.93,25.72 73.93,26.04 74.61,26.71 75.38,26.71 75.8,27.14 RN3.7
Q1-D
  Top 0.61: Q1.D 17.14,35.34 L11.C
  Bottom 1.422: Q1.D 17.14,37.51 12.02,32.38 X3.1
Q1-G
  Top 0.61: R51.2 20.95,36.83 Q1.G
Q2-D
  Top 0.61: Q2.D 16.73,26.67 L12.C
  Bottom 1.422: X3.3 11.43,26.67 Q2.D
Q2-G
  Top 0.61: R52.2 16.21,27.62 15.89,27.94 15.88,27.94 Q2.G
Q6-D
  Top 0.406: L6.C 4.9,53.85 5.89,52.86 7.77,52.86 FANS.2
  Top 0.813: Q3.6 Q3.5 9.99,53.98 FANS.2
Q6-G
  Top 0.305: R56.2 20,51.44 Q3.4
Q7-D
  Top 0.406: L7.C 5.4,50.8 5.89,50.32 7.77,50.32 FANS.4
  Top 0.813: Q3.8 Q3.7 11.43,48.9 FANS.4
Q7-G
  Top 0.305: R57.2 20,48.9 Q3.2
Q8-D
  Top 0.406: L8.C 4.13,49.66 4.93,48.85 4.93,48.73 5.89,47.78 7.77,47.78 FANS.6
  Top 0.813: Q4.6 Q4.5 8.89,48.72 FANS.6
Q8-G
  Top 0.305: R58.2 Q4.4
Q9-D
  Top 0.406: L9.C 4.51,46.61 5.89,45.24 6.81,45.24 7.93,46.35 FANS.8
  Top 0.813: Q4.8 Q4.7 11.19,42.55 8.89,44.84 FANS.8
Q9-G
  Top 0.305: R59.2 Q4.2
RD+
  Top 0.203: R6.1 73.83,13.09 75.56,13.09 75.94,13.09 76.02,13.09 77.23,14.29 IC4.29
RD-
  Top 0.203: R5.1 75.96,12.68 76.19,12.68 77.73,14.22 IC4.30
RESET  (via drill 0.4)
  Top 0.203: ATMEGA2560.30 57,30.41 v57.79,29.62 57.77,29.62 57.07,28.92 56.48,28.92 54.92,30.48 40.38,30.48 39.56,31.3 39.56,32.83 ICSP.5 35.88,32.07 R4.1 38.39,29.24 C1.1 | v86.17,28.38 86.17,28.47 C7.2
  Top 0.406: RESET.1 87.2,3.13 D3.A
  Bottom 0.203: v86.17,28.38 85.74,28.38 84.25,29.87 72.86,29.87 71.02,28.03 64.41,28.03 62.3,30.14 61.41,30.14 60.94,29.66 57.83,29.66 v57.79,29.62
  Bottom 0.305: RESET.1 94.87,10.79 97.47,10.79 98.27,11.6 98.27,22.69 97.62,23.34 91.21,23.34 v86.17,28.38
RESET2
  Top 0.203: R3.1 67,21.07 D2.A 66.04,20.11 ICSP1.5 67.5,16.95 71.94,16.95 73.4,15.5 IC4.24
RX
  Top 0.203: RN3.6 76.6,27.55 77.02,27.98 79.12,27.98 RX.A
RXL
  Top 0.203: IC4.10 78.23,21.93 RX.C
SCK  (via drill 0.4)
  Top 0.203: ATMEGA2560.20 44.56,36.5 v44.35,36.29 | v40.52,57.44 42.53,57.44 42.53,57.43 v42.55,57.43 | v74.84,55.81 73.01,55.81 v72.86,55.96 | v57.15,58.83 58.42,58.83 58.42,58.82 v59.29,58.82
  Bottom 0.203: ICSP.3 42.64,36.29 v44.35,36.29 41.81,36.29 36.37,41.73 34.59,41.73 33.48,42.84 33.48,52.99 35.96,55.47 38.56,55.47 v40.52,57.44 40.52,62.87 37.25,66.13 | U$3.CFG-2 57.15,65.41 v57.15,58.83 57.05,58.83 53.7,55.47 44.51,55.47 v42.55,57.43 | U$4.CFG-2 87.96,66.34 87.96,56.16 87.31,55.51 75.14,55.51 v74.84,55.81 | U$5.CFG-2 72.86,65.57 v72.86,55.96 72.77,55.96 72.31,55.51 62.6,55.51 v59.29,58.82 | U$1.CFG-2 23.33,70.48 32.41,61.4 33.63,61.4 34.48,62.26 34.48,65.19 35.76,66.46 36.92,66.46 37.25,66.13 | 37.25,66.13 37.25,69.43 U$2.CFG-2
SCK2
  Top 0.203: IC4.15 75.73,20.16 74.85,21.03 72.09,21.03 71.68,20.61 71.68,20.32 71.11,19.75 69.92,19.75 ICSP1.3
SCL  (via drill 0.4)
  Top 0.203: v58.34,20.24 57.48,20.24 55.89,21.83 55.89,21.95 R12.1 54.82,22.16 53.54,22.16 50.8,19.42 I2C.4 | v60.65,18.71 60.65,19.14 62.83,21.32 62.83,24.67 65.41,27.25 65.41,29.03 63.5,30.95 ATMEGA2560.43
  Bottom 0.203: v58.34,20.24 59.13,20.24 v60.65,18.71
SDA  (via drill 0.4)
  Top 0.203: v59.05,20.95 57.34,20.95 56.3,22 56.3,23.98 R11.1 51.8,21.59 I2C.3 | v61.66,19.14 61.66,19.57 63.23,21.15 63.23,24.5 65.82,27.08 65.82,29.2 64,31.02 ATMEGA2560.44
  Bottom 0.203: v59.05,20.95 59.84,20.95 v61.66,19.14
TX
  Top 0.203: RN3.5 77.84,27.34 TX.A
TXL
  Top 0.203: IC4.11 77.73,23.34 TX.C
UGND  (via drill 0.4)
  Top 0.203: C10.2 69.68,11.64 69.68,13.06 70.11,13.49 75.85,13.49 76.73,14.37 IC4.28
  Top 0.254: L1.1 66.04,9.36 v66.04,9.53
  Top 0.813: 66.04,8.09 66.89,8.09 68.58,9.77 C10.2 | 66.04,8.09 L1.1 | X2.4 73.82,6.52 72.38,5.07 69.06,5.07 66.04,8.09
  Bottom 0.254: v66.04,9.53 65.15,9.53 GND.1
  Bottom 0.305: GND.1 64.77,10.16
USBVCC
  Top 0.203: C8.1 80.64,12.03 78.23,14.45 IC4.31
  Top 0.406: X2.1 77.01,5.78 77.01,2.98 78.19,1.8 79.86,1.8 81.6,3.54 81.6,7.55 C8.1
USHIELD  (via drill 0.4)
  Top 0.813: X2.P$1 64.95,5.88 L1.2 | v67.94,7.62 70.48,10.16 Z2.1 | X2.P$2 78.11,4.73 Z1.1
  Bottom 0.813: X2.P$1 67.03,6.7 v67.94,7.62
  Bottom 1.422: X2.P$1 69.11,1.73 76.94,1.73 X2.P$2
VIN
  Top 1.016: D4.C 26.18,7.48 PC1.+ | PC1.+ 34.77,7.48 C2.1 | 32.88,7.48 PC1.+ | PC1.+ 34.43,11.43 39.37,11.43 40.56,12.62 IC1.3
VUCAP
  Top 0.203: IC4.27 76.23,14.45 75.75,13.97 70.02,13.97 68.58,12.53 C10.1
X-1
  Bottom 1.422: X-MOT.1 30.48,77.68 29.73,76.93 29.73,73.78 U$1.OB2
X-2
  Bottom 1.422: X-MOT.2 28.1,81.75 28.1,72.86 U$1.OB1
X-3
  Bottom 1.422: U$1.OA1 26.15,72.27 26.15,76.93 25.4,77.68 X-MOT.3
X-4
  Bottom 1.422: U$1.OA2 24.53,71.36 24.53,76.26 22.86,77.92 X-MOT.4
XT1
  Top 0.203: IC4.1 82.55,15.5 R2.1 C14.1 86.82,13.39 Y2.2
XT2
  Top 0.203: IC4.2 82.55,16 R2.2 C15.1 86.82,18.11 Y2.1
XTAL1
  Top 0.203: R1.1 59.75,25.38 | 59.75,25.38 Y1.3 | 59.75,25.38 59.75,26.18 58.98,26.96 58.98,31.11 59,31.14 ATMEGA2560.34
XTAL2
  Top 0.203: ATMEGA2560.33 58.5,26.93 57.75,26.18 57.77,26.16 R1.2 57.77,22.88 Y1.1
Y-1
  Bottom 1.422: U$2.OB2 45.6,73.78 45.6,76.93 46.35,77.68 Y-MOT.1
Y-2
  Bottom 1.422: U$2.OB1 43.98,72.86 43.98,81.75 Y-MOT.2
Y-3
  Bottom 1.422: U$2.OA1 42.03,72.27 42.03,76.93 41.27,77.68 Y-MOT.3
Y-4
  Bottom 1.422: Y-MOT.4 38.73,77.92 40.4,76.26 40.4,71.36 U$2.OA2
Z-1
  Bottom 1.422: U$3.OB2 61.48,73.78 61.48,76.93 62.23,77.68 Z-MOT1.1 Z-MOT.1
Z-2
  Bottom 1.422: U$3.OB1 59.85,72.86 59.85,79.22 Z-MOT1.2 Z-MOT.2
Z-3
  Bottom 1.422: U$3.OA1 57.9,72.27 57.9,76.93 57.15,77.68 Z-MOT1.3 Z-MOT.3
Z-4
  Bottom 1.422: U$3.OA2 56.28,71.36 56.28,76.26 54.61,77.92 Z-MOT1.4 Z-MOT.4

## Text on the board
tPlace: E1 | E0 | Z | Y | X | T0 | T1 | T2 | T3 | D6 | D7 | AMR3350 | PWM | Rev 1.0.5 | D8 | ANA | D9 | SER | - | + | - | + | + | D10 | - | D11 | D11 | ANALOG | GPIO | ENDSTOPS | + | + | 12V Z- | D12 | DIGITAL | - | D12 | CTRST | + | PWM | - | 5A MAX | CTRST